# Altium PCB Filtros.PcbDoc
Units mil, origin at the board's own origin, x right, y up, seen from the top; angles counter-clockwise.
Board outline 6000 x 4000 mil, 2 copper layers (Top Layer, Bottom Layer); 155 components, 163 nets, 356 pads, 38 vias.
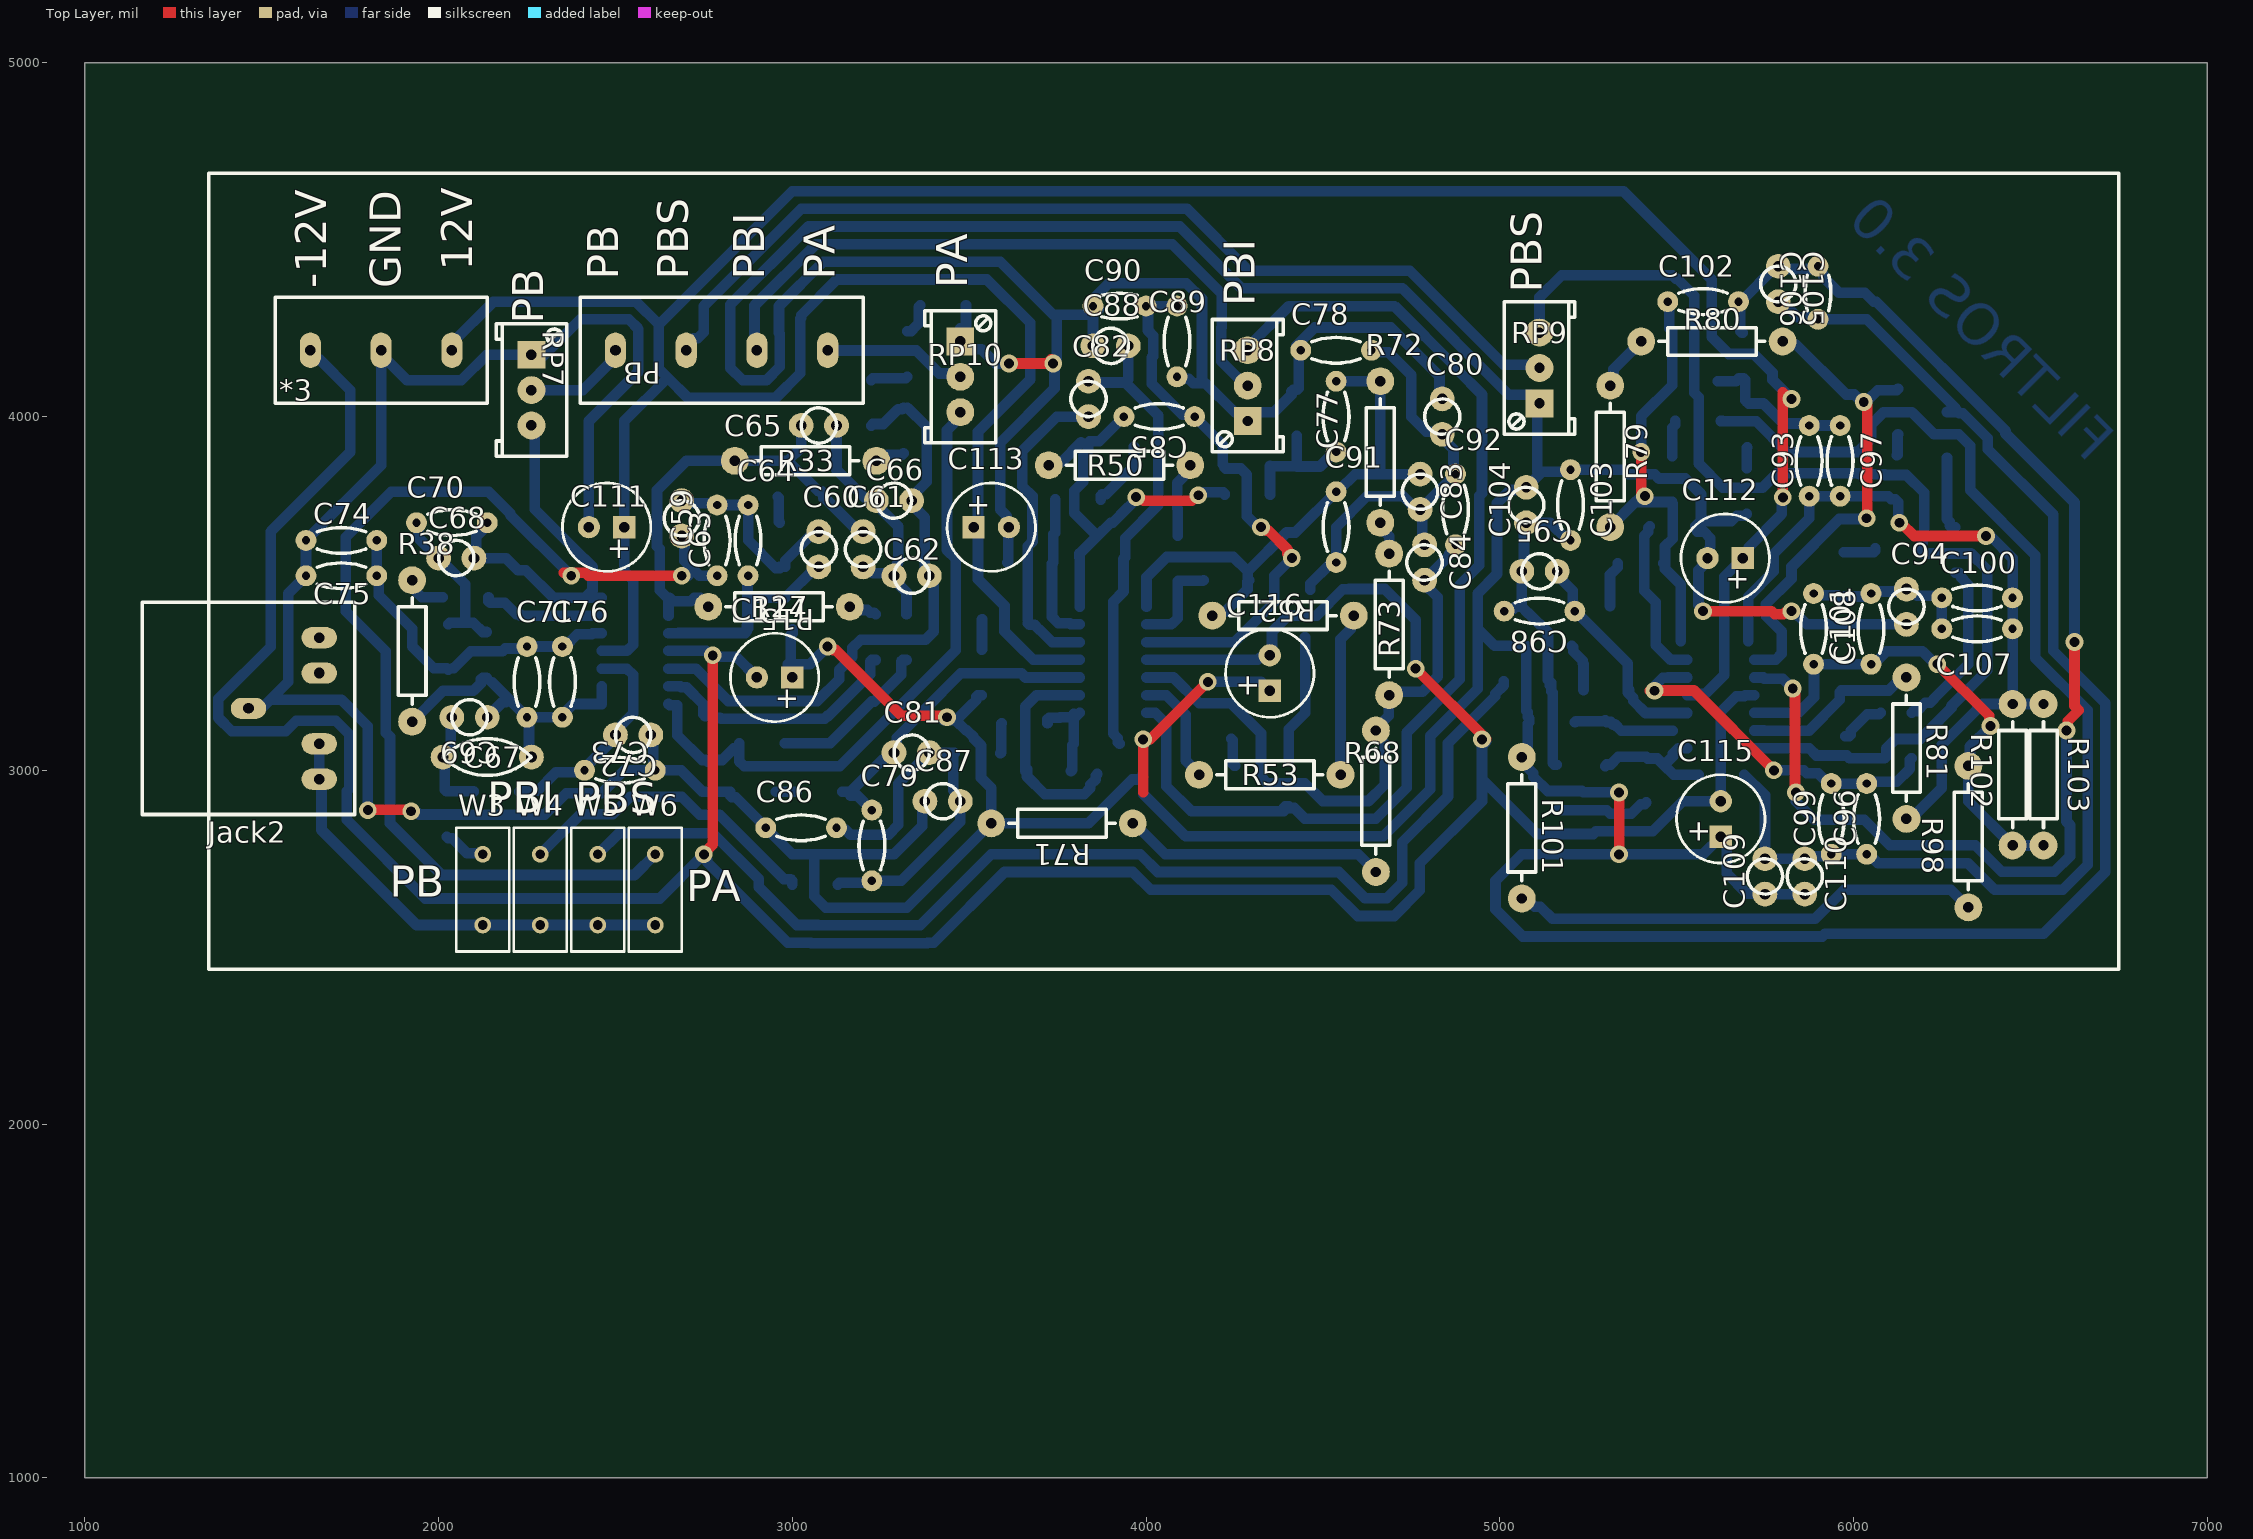
[diagram p0: Top Layer view]
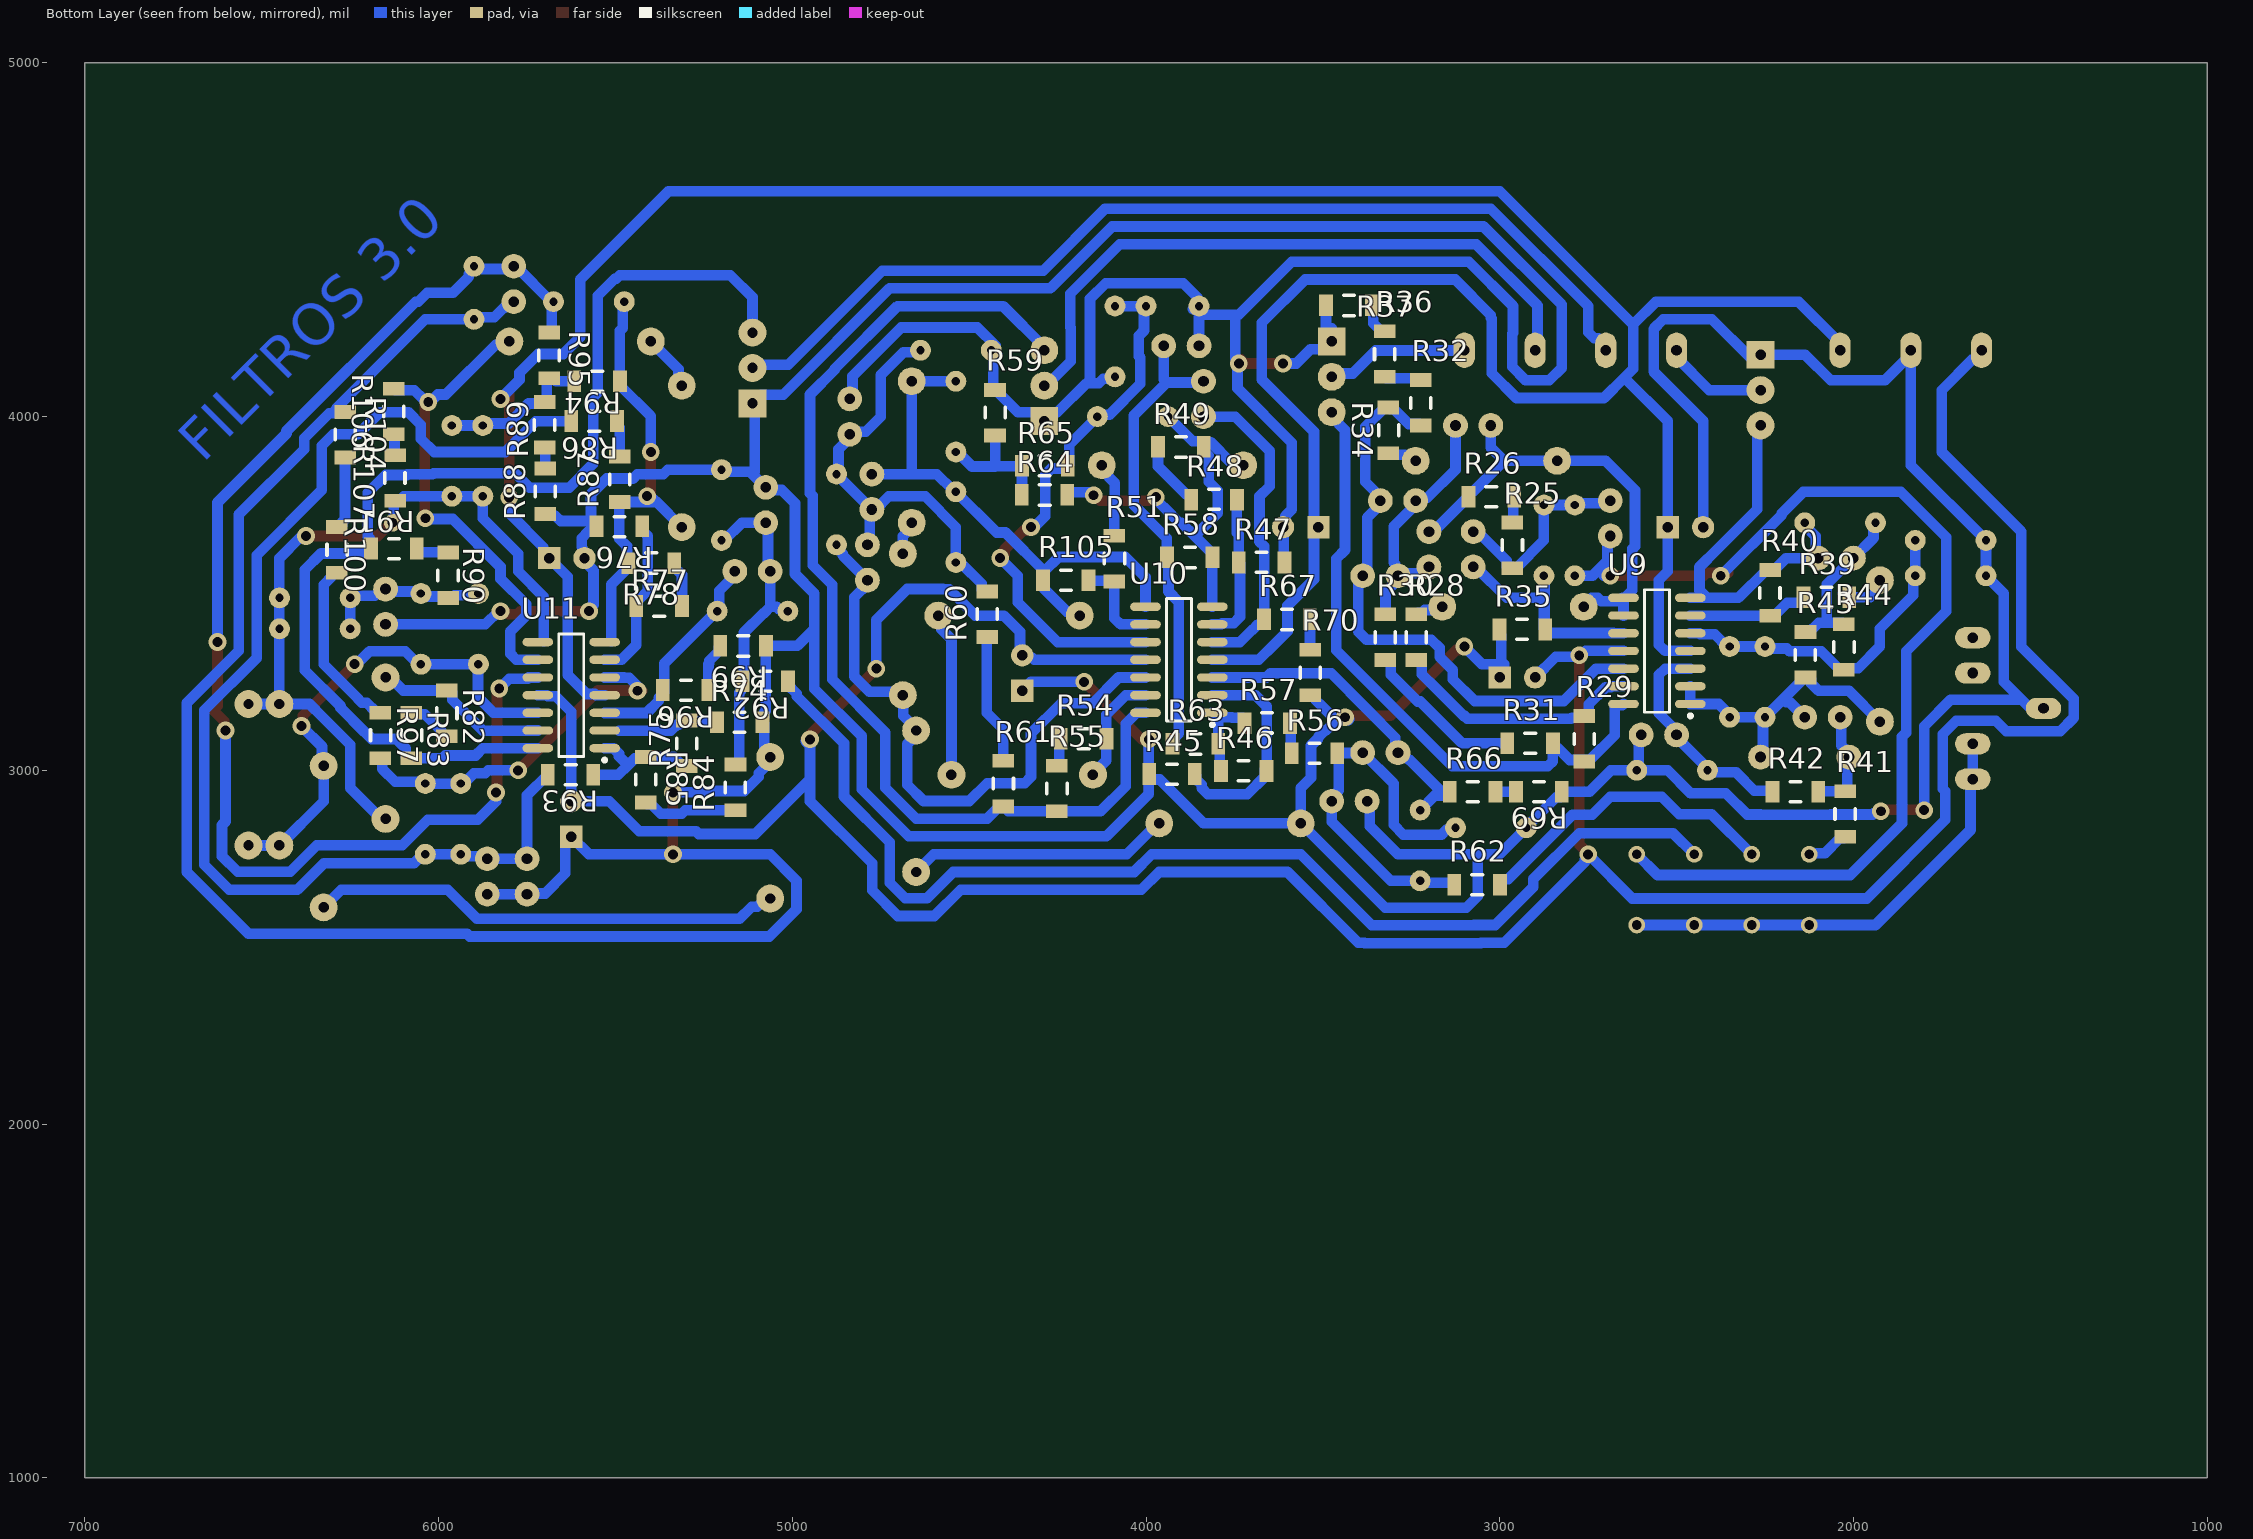
[diagram p1: Bottom Layer view, seen from below]
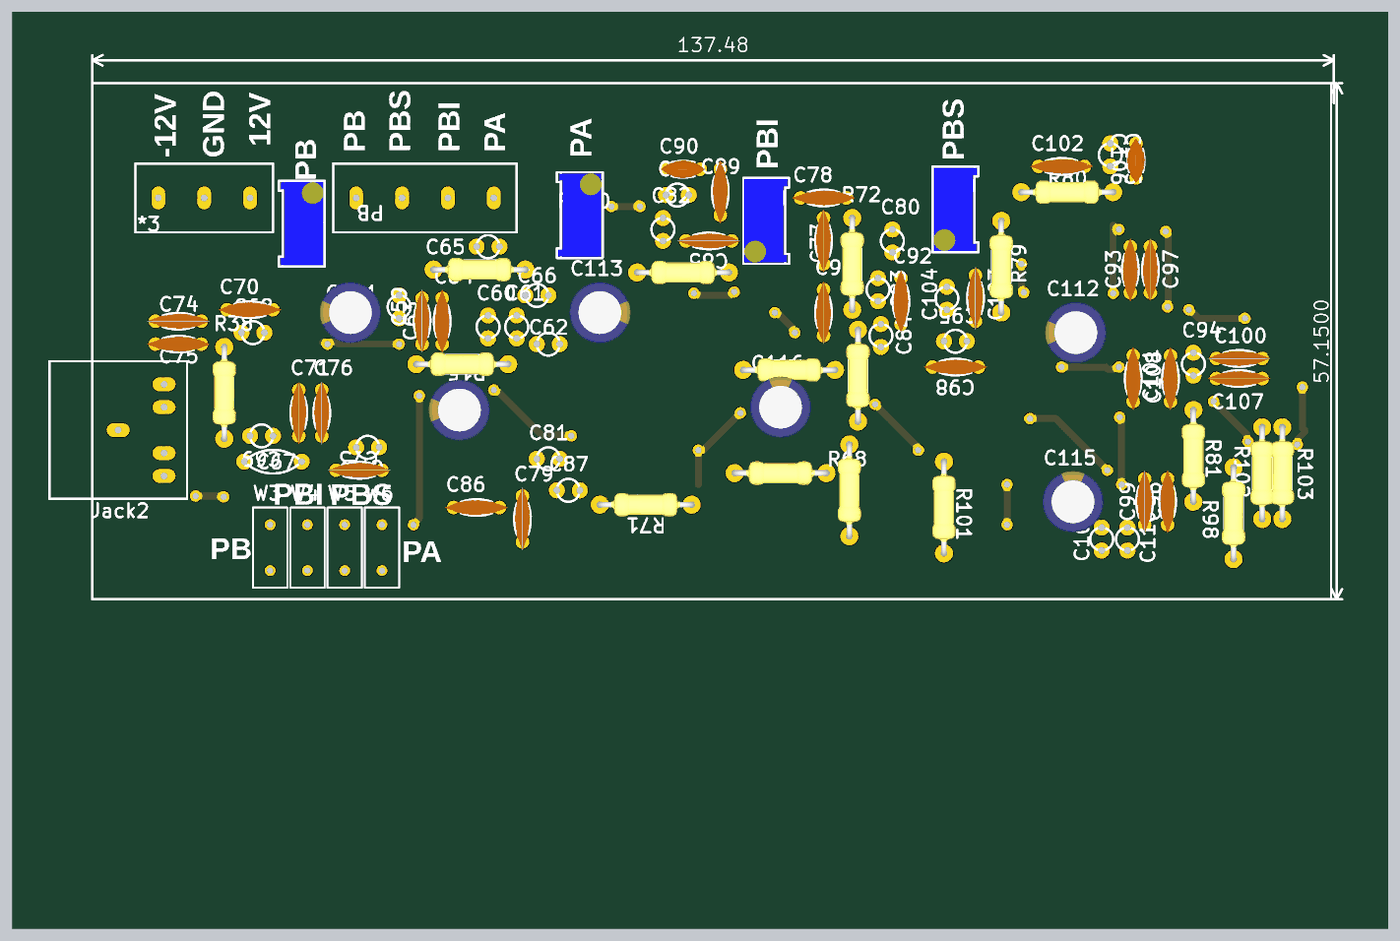
[diagram p2: 3D render of the assembled board from above, using the file's embedded part models]

## Layer stack, top to bottom
Top Solder: solder mask 0.4, Solder Resist, Dk 3.5
Top Layer: signal copper 1.4
Dielectric 1: dielectric 12.6, FR-4, Dk 4.8
Bottom Layer: signal copper 1.4
Bottom Solder: solder mask 0.4, Solder Resist, Dk 3.5

## Board outline
1000,1000 7000,1000 7000,5000 1000,5000

## Design rules (kind name [scope] priority, off if disabled: settings)
Clearance [All] p1: gap=20 ignorepadtopadclearanceinfootprint=TRUE except(0: Arc-Text Arc-Hole Track-Text Track-Hole SMDPad-Text SMDPad-Hole THPad-Text THPad-Hole Via-Text Via-Hole Fill-Text Fill-Hole Poly-Text Poly-Hole Region-Text Region-Hole Text-Text Text-Hole; 40: Arc-Fill Arc-Poly Arc-Region Track-Fill Track-Poly Track-Region)
ComponentClearance [All] p1: gap=0 collisioncheckmode=3 verticalgap=0 showdistances=FALSE
PolygonConnect [All] p1: connectstyle=Relief reliefconductorwidth=10 reliefentries=4 polygonreliefangle="90 Angle" airgapwidth=10
RoutingVias [All] p1: holewidth=28 width=50 viastyle="Through Hole" minholewidth=28 minwidth=50 maxholewidth=28 maxwidth=50
SolderMaskExpansion [All] p1: expansion=4 istentingtop=FALSE
Width [All] p1: maxlimit=60 minlimit=30 preferedwidth=40 minimp=50.000000 maximp=50.000000 favimp=50.000000
29 further rules are at their usual default settings.

## Classes and differential pairs
component class U_Filtros: *3 C111 C112 C113 C114 C115 C116 Jack2 P15 RP7 RP8 RP9 RP10 W3 W4 W5 W6
component class "Positive Pwr": *1
component class "Negative Pwr": *2
component class "Pasa Banda Superior": C93 C94 C95 C96 C97 C98 C99 C100 C101 C102 C103 C104 C105 C106 C107 C108 C109 C110 R74 R75 R76 R77 R78 R79 R80 R81 R82 R83 R84 R85 R86 R87 R88 R89 R90 R91 R92 R93 R94 R95 R96 R97 R98 R99 R100 R101 R102 R103 R104 R106 R107 U11
component class "Pasa Banda Inferior": C77 C78 C79 C80 C81 C82 C83 C84 C85 C86 C87 C88 C89 C90 C91 C92 R45 R46 R47 R48 R49 R50 R51 R52 R53 R54 R55 R56 R57 R58 R59 R60 R61 R62 R63 R64 R65 R66 R67 R68 R69 R70 R71 R72 R73 R105 U10
component class "Pasa Bajos": C67 C68 C69 C70 C71 C72 C73 C74 C75 C76 R38 R39 R40 R41 R42 R43 R44 U9
component class "Pasa Altos": C59 C60 C61 C62 C63 C64 C65 C66 R25 R26 R27 R28 R29 R30 R31 R32 R33 R34 R35 R36 R37

## Components (designator, comment, footprint, x,y, rotation, side; value= is the part's Value field where it differs from the comment)
*3 "Bornera 3" "bornera 3" 1637.5,4187.5 r0 top
C59 "Cap Ceramico Disco" "cap 10" 2687.5,3712.5 r270 top
C60 "Cap Ceramico Disco" "cap 10" 3075,3625 r90 top
C61 "Cap Ceramico Disco" "cap 10" 3200,3625 r90 top
C62 "Cap Ceramico Disco" "cap 10" 3337.5,3550 r180 top
C63 "Cap Ceramico Disco" "CAP DISCO 200mil" 2787.5,3650 r270 top
C64 "Cap Ceramico Disco" "CAP DISCO 200mil" 2875,3650 r90 top
C65 "Cap Ceramico Disco" "cap 10" 3075,3975 r180 top
C66 "Cap Ceramico Disco" "cap 10" 3287.5,3762.5 r180 top
C67 "Cap Ceramico Disco" "cap 25" 2162.5,3037.5 r180 top
C68 "Cap Ceramico Disco" "cap 10" 2050,3600 r0 top
C69 "Cap Ceramico Disco" "cap 10" 2087.5,3150 r180 top
C70 "Cap Ceramico Disco" "CAP DISCO 200mil" 2037.5,3700 r0 top
C71 "Cap Ceramico Disco" "CAP DISCO 200mil" 2250,3250 r270 top
C72 "Cap Ceramico Disco" "cap 10" 2550,3100 r180 top
C73 "Cap Ceramico Disco" "CAP DISCO 200mil" 2512.5,3000 r180 top
C74 "Cap Ceramico Disco" "CAP DISCO 200mil" 1725,3650 r180 top
C75 "Cap Ceramico Disco" "CAP DISCO 200mil" 1725,3550 r180 top
C76 "Cap Ceramico Disco" "CAP DISCO 200mil" 2350,3250 r270 top
C77 "Cap Ceramico Disco" "CAP DISCO 200mil" 4537.5,4000 r270 top
C78 "Cap Ceramico Disco" "CAP DISCO 200mil" 4537.5,4187.5 r180 top
C79 "Cap Ceramico Disco" "CAP DISCO 200mil" 3225,2787.5 r270 top
C80 "Cap Ceramico Disco" "cap 10" 4837.5,4000 r90 top
C81 "Cap Ceramico Disco" "cap 10" 3337.5,3050 r0 top
C82 "Cap Ceramico Disco" "cap 10" 3837.5,4050 r90 top
C83 "Cap Ceramico Disco" "cap 10" 4775,3787.5 r90 top
C84 "Cap Ceramico Disco" "cap 10" 4787.5,3587.5 r90 top
C85 "Cap Ceramico Disco" "CAP DISCO 200mil" 4037.5,4000 r180 top
C86 "Cap Ceramico Disco" "CAP DISCO 200mil" 3025,2837.5 r0 top
C87 "Cap Ceramico Disco" "cap 10" 3425,2912.5 r0 top
C88 "Cap Ceramico Disco" "cap 10" 3900,4200 r0 top
C89 "Cap Ceramico Disco" "CAP DISCO 200mil" 4087.5,4212.5 r270 top
C90 "Cap Ceramico Disco" "CAP DISCO 150mil" 3925,4312.5 r180 top
C91 "Cap Ceramico Disco" "CAP DISCO 200mil" 4537.5,3687.5 r90 top
C92 "Cap Ceramico Disco" "CAP DISCO 200mil" 4875,3737.5 r90 top
C93 "Cap Ceramico Disco" "CAP DISCO 200mil" 5875,3875 r90 top
C94 "Cap Ceramico Disco" "cap 10" 6150,3462.5 r270 top
C95 "Cap Ceramico Disco" "cap 10" 5112.5,3562.5 r180 top
C96 "Cap Ceramico Disco" "CAP DISCO 200mil" 6037.5,2862.5 r270 top
C97 "Cap Ceramico Disco" "CAP DISCO 200mil" 5962.5,3875 r90 top
C98 "Cap Ceramico Disco" "CAP DISCO 200mil" 5112.5,3450 r180 top
C99 "Cap Ceramico Disco" "CAP DISCO 200mil" 5937.5,2862.5 r270 top
C100 "Cap Ceramico Disco" "CAP DISCO 200mil" 6350,3487.5 r0 top
C101 "Cap Ceramico Disco" "CAP DISCO 200mil" 6050,3400 r90 top
C102 "Cap Ceramico Disco" "CAP DISCO 200mil" 5575,4325 r180 top
C103 "Cap Ceramico Disco" "CAP DISCO 200mil" 5200,3750 r270 top
C104 "Cap Ceramico Disco" "cap 10" 5075,3750 r270 top
C105 "Cap Ceramico Disco" "cap 10" 5787.5,4375 r270 top
C106 "Cap Ceramico Disco" "CAP DISCO 150mil" 5900,4350 r270 top
C107 "Cap Ceramico Disco" "CAP DISCO 200mil" 6350,3400 r0 top
C108 "Cap Ceramico Disco" "CAP DISCO 200mil" 5887.5,3400 r90 top
C109 "Cap Ceramico Disco" "cap 10" 5750,2700 r90 top
C110 "Cap Ceramico Disco" "cap 10" 5862.5,2700 r90 top
C111 "Cap Electrolitico Radial" "CAPR D250 H600 R100 mil" 2475,3687.5 r180 top
C112 "Cap Electrolitico Radial" "CAPR D250 H600 R100 mil" 5637.5,3600 r180 top
C113 "Cap Electrolitico Radial" "CAPR D250 H600 R100 mil" 3562.5,3687.5 r0 top
C114 "Cap Electrolitico Radial" "CAPR D250 H600 R100 mil" 2950,3262.5 r180 top
C115 "Cap Electrolitico Radial" "CAPR D250 H600 R100 mil" 5625,2862.5 r90 top
C116 "Cap Electrolitico Radial" "CAPR D250 H600 R100 mil" 4350,3275 r90 top
Jack2 "Jack 3.5mm" "jack 3.5mm" 1662.5,2975 r90 top
P15 "Header 4" "Bornera 4" 2500,4187.5 r0 top
R25 "Res SMD" "1206 resistor" 2962.5,3637.5 r270 bottom
R26 "Res SMD" "1206 resistor" 3025,3775 r180 bottom
R27 "Res SMD" "RES AXIAL 400mil" 2962.5,3462.5 r0 top
R28 "Res SMD" "1206 resistor" 3237.5,3375 r90 bottom
R29 "Res SMD" "1206 resistor" 2762.5,3087.5 r90 bottom
R30 "Res SMD" "1206 resistor" 3325,3375 r90 bottom
R31 "Res SMD" "1206 resistor" 2912.5,3075 r0 bottom
R32 "Res SMD" "1206 resistor" 3225,4037.5 r90 bottom
R33 "Res SMD" "RES AXIAL 400mil" 3037.5,3875 r0 top
R34 "Res SMD" "1206 resistor" 3312.5,3962.5 r270 bottom
R35 "Res SMD" "1206 resistor" 2937.5,3400 r180 bottom
R36 "Res SMD" "1206 resistor" 3327,4175.5 r90 bottom
R37 "Res SMD" "1206 resistor" 3425,4312.5 r0 bottom
R38 "Res SMD" "RES AXIAL 400mil" 1925,3337.5 r90 top
R39 "Res SMD" "1206 resistor" 2075,3487.5 r0 bottom
R40 "Res SMD" "1206 resistor" 2237.5,3500 r90 bottom
R41 "Res SMD" "1206 resistor" 2025,2875 r90 bottom
R42 "Res SMD" "1206 resistor" 2162.5,2937.5 r0 bottom
R43 "Res SMD" "1206 resistor" 2137.5,3325 r90 bottom
R44 "Res SMD" "1206 resistor" 2025,3350 r270 bottom
R45 "Res SMD" "1206 resistor" 3925,2987.5 r0 bottom
R46 "Res SMD" "1206 resistor" 3725,3000 r180 bottom
R47 "Res SMD" "1206 resistor" 3674.5,3589.5 r180 bottom
R48 "Res SMD" "1206 resistor" 3809,3767.5 r180 bottom
R49 "Res SMD" "1206 resistor" 3900,3912.5 r0 bottom
R50 "Res SMD" "RES AXIAL 400mil" 3925,3862.5 r0 top
R51 "Res SMD" "1206 resistor" 4087.5,3600 r270 bottom
R52 "Res SMD" "RES AXIAL 400mil" 4387.5,3437.5 r0 top
R53 "Res SMD" "RES AXIAL 400mil" 4350,2987.5 r180 top
R54 "Res SMD" "1206 resistor" 4175,3087.5 r0 bottom
R55 "Res SMD" "1206 resistor" 4250,2950 r270 bottom
R56 "Res SMD" "1206 resistor" 3525,3050 r180 bottom
R57 "Res SMD" "1206 resistor" 3658.5,3135.5 r180 bottom
R58 "Res SMD" "1206 resistor" 3875,3600 r0 bottom
R59 "Res SMD" "1206 resistor" 4425,4012.5 r270 bottom
R60 "Res SMD" "1206 resistor" 4447.16,3442.5 r270 bottom
R61 "Res SMD" "1206 resistor" 4401.62,2963.88 r270 bottom
R62 "Res SMD" "1206 resistor" 3062.5,2675 r0 bottom
R63 "Res SMD" "1206 resistor" 3859,3073 r0 bottom
R64 "Res SMD" "1206 resistor" 4285.37,3776.89 r0 bottom
R65 "Res SMD" "1206 resistor" 4287.5,3862.5 r180 bottom
R66 "Res SMD" "1206 resistor" 3075,2937.5 r0 bottom
R67 "Res SMD" "1206 resistor" 3600,3425 r0 bottom
R68 "Res SMD" "RES AXIAL 400mil" 4650,2912.5 r90 top
R69 "Res SMD" "1206 resistor" 2887.5,2937.5 r0 bottom
R70 "Res SMD" "1206 resistor" 3537.5,3275 r90 bottom
R71 "Res SMD" "RES AXIAL 400mil" 3762.5,2850 r0 top
R72 "Res SMD" "RES AXIAL 400mil" 4662.5,3900 r270 top
R73 "Res SMD" "RES AXIAL 400mil" 4687.5,3412.5 r270 top
R74 "Res SMD" "1206 resistor" 5150,3137.5 r180 bottom
R75 "Res SMD" "1206 resistor" 5300,3075 r90 bottom
R76 "Res SMD" "1206 resistor" 5487.5,3687.5 r0 bottom
R77 "Res SMD" "1206 resistor" 5375,3462.5 r0 bottom
R78 "Res SMD" "1206 resistor" 5400,3587.5 r180 bottom
R79 "Res SMD" "RES AXIAL 400mil" 5312.5,3887.5 r90 top
R80 "Res SMD" "RES AXIAL 400mil" 5600,4212.5 r0 top
R81 "Res SMD" "RES AXIAL 400mil" 6150,3062.5 r90 top
R82 "Res SMD" "1206 resistor" 5975,3162.5 r270 bottom
R83 "Res SMD" "1206 resistor" 6075,3100 r270 bottom
R84 "Res SMD" "1206 resistor" 5162.5,2950 r90 bottom
R85 "Res SMD" "1206 resistor" 5412.5,2975 r270 bottom
R86 "Res SMD" "1206 resistor" 5559,3985.5 r0 bottom
R87 "Res SMD" "1206 resistor" 5489.5,3821.5 r90 bottom
R88 "Res SMD" "1206 resistor" 5700,3787.5 r90 bottom
R89 "Res SMD" "1206 resistor" 5702,3975.5 r90 bottom
R90 "Res SMD" "1206 resistor" 5975,3550 r90 bottom
R91 "Res SMD" "1206 resistor" 6125,3625 r0 bottom
R92 "Res SMD" "1206 resistor" 5075,3250 r0 bottom
R93 "Res SMD" "1206 resistor" 5625.5,2985.5 r0 bottom
R94 "Res SMD" "1206 resistor" 5550.5,4098 r0 bottom
R95 "Res SMD" "1206 resistor" 5689.5,4171.5 r90 bottom
R96 "Res SMD" "1206 resistor" 5300,3225 r0 bottom
R97 "Res SMD" "1206 resistor" 6162.5,3100 r270 bottom
R98 "Res SMD" "RES AXIAL 400mil" 6325,2812.5 r90 top
R99 "Res SMD" "1206 resistor" 5137.5,3350 r0 bottom
R100 "Res SMD" "1206 resistor" 6285.5,3624.5 r270 bottom
R101 "Res SMD" "RES AXIAL 400mil" 5062.5,2837.5 r270 top
R102 "Res SMD" "RES AXIAL 400mil" 6450,2987.5 r270 top
R103 "Res SMD" "RES AXIAL 400mil" 6537.5,2987.5 r270 top
R104 "Res SMD" "1206 resistor" 6262.5,3950 r270 bottom
R105 "Res SMD" "1206 resistor" 4225.5,3535.5 r0 bottom
R106 "Res SMD" "1206 resistor" 6128.25,4013 r90 bottom
R107 "Res SMD" "1206 resistor" 6125,3825 r90 bottom
RP7 "Trimpot" "Trimpot Multivuelta Vertical" 2262.5,4075 r90 top
RP8 "Trimpot" "Trimpot Multivuelta Vertical" 4287.5,4087.5 r270 top
RP9 "Trimpot" "Trimpot Multivuelta Vertical" 5112.5,4137.5 r270 top
RP10 "Trimpot" "Trimpot Multivuelta Vertical" 3475,4112.5 r90 top
U9 "TL084ACD" 751A-02_N 2555.51,3337.5 r0 bottom
U10 "TL084ACD" 751A-02_N 3906.99,3312.5 r0 bottom
U11 "TL084ACD" 751A-02_N 5625,3212.5 r0 bottom
W3 "Jumper" RAD-0.2 2125,2662.5 r90 top
W4 "Jumper" RAD-0.2 2287.5,2662.5 r90 top
W5 "Jumper" RAD-0.2 2450,2662.5 r90 top
W6 "Jumper" RAD-0.2 2612.5,2662.5 r90 top

## Footprints (in the part's own frame and the unit in brackets; to place one, negate y for a bottom-side part, rotate by r counter-clockwise, add the part's x,y. Pads: shape width x height; smd on the part's side, far side on the other; paste and mask are expansions set on the pad)
751A-02_N [mm] "SOIC, 14-Leads, Body 8.7x3.9mm, Pitch 1.27mm, IPC Medium Density"
  oval 2.2x0.6 smd: 1(-2.4,3.81) 2(-2.4,2.54) 3(-2.4,1.27) 4(-2.4,0) 5(-2.4,-1.27) 6(-2.4,-2.54) 7(-2.4,-3.81) 8(2.4,-3.81) 9(2.4,-2.54) 10(2.4,-1.27) 11(2.4,0) 12(2.4,1.27) 13(2.4,2.54) 14(2.4,3.81)
  silkscreen extent -2.52,-4.4 0.9,4.78, body extent -1.95,-4.33 1.95,4.33, height 1.75
"1206 resistor" [mil]
  rect 39x61 smd: 1(-63,-2) 2(66,-2)
  silkscreen extent -14,-30 16,27
"bornera 3" [mil]
  oval 60x100 hole 30: 1(0,0) 2(200,0) 3(400,0)
  silkscreen extent -100,-150 500,150
"Bornera 4" [mil]
  oval 60x100 hole 30: 1(0,0) 2(200,0) 3(400,0) 4(600,0)
  silkscreen extent -100,-150 700,150
"cap 10" [mil]
  round 70 hole 30: 1(-50,0) 2(50,0)
  silkscreen extent -50,-50 50,50
"cap 25" [mil]
  round 70 hole 30: 1(-100,0) 2(150,0)
  silkscreen extent -100,-52 150,52
"CAP DISCO 150mil" [mm] "Capacitor; 2 Leads"
  round 1.5 hole 0.6: 1(-1.905,0) 2(1.905,0)
  silkscreen extent -1.27,-0.92 1.27,0.92, body extent -2.46,-1 2.46,1, height 6.96
"CAP DISCO 200mil" [mm] "Capacitor; 2 Leads"
  round 1.5 hole 0.6: 1(-2.54,0) 2(2.54,0)
  silkscreen extent -1.74,-0.93 1.74,0.93, body extent -3.5,-0.85 3.49,0.85, height 7.5
"CAPR D250 H600 R100 mil" [mm]
  rect 1.6x1.6 hole 0.75: 1(-1.27,0)
  round 1.6 hole 0.75: 2(1.27,0)
  silkscreen extent -3.17,-3.17 3.17,3.17, body extent -3.4,-3.39 3.37,3.39, height 2.49
"jack 3.5mm" [mil]
  oval 60x100 hole 30: 1(0,0) 1(100,0) 2(300,0) 2(400,0) 3(200,200)
  Top Layer region: 400,400
  silkscreen extent -100,-100 500,500
RAD-0.2 [mm] "Radial Cap, Thru-Hole; 2 Leads; 0.2 in Pin Spacing"
  round 1.2 hole 0.7: 1(-2.54,0) 2(2.54,0)
  silkscreen extent -4.44,-1.91 4.44,1.91
"RES AXIAL 400mil" [mm]
  round 2 hole 0.75: 1(-5.08,0) 2(5.08,0)
  silkscreen extent -3.81,-1 3.81,1, body extent -5.41,-1.3 5.41,1.3, height 2.7
"Trimpot Multivuelta Vertical" [mm] "Preset Multivuelta de ajuste vertical"
  rect 2x2 hole 0.75: 1(2.54,0)
  round 2 hole 0.75: 2(-2.54,0) 3(0,0)
  silkscreen extent -4.75,-2.54 4.75,2.54, body extent -4.6,-2.41 4.6,2.39, height 12.06

## Part data
C59 C60 C61 C62 C63 C64 C65 C66 C67 C68 C69 C70 C71 C72 C73 C74 C75 C76 C77 C78 C79 C80 C81 C82 C83 C84 C85 C86 C87 C88 C89 C90 C91 C92 C93 C94 C95 C96 C97 C98 C99 C100 C101 C102 C103 C104 C105 C106 C107 C108 C109 C110: "Capacitor Ceramico de Insercion", FABRICANTE=Generico
  C59 C60 C61 C62 C110: VALOR=2.2nF
  C63 C64 C96: VALOR=560pF
  C65 C66 C76 C80 C105: VALOR=470pF
  C67: VALOR=56nF
  C68 C82 C88: VALOR=33nF
  C69: VALOR=4.7nF
  C70 C77: VALOR=100nF
  C71 C98 C103 C107 C108: VALOR=5.6nF
  C72 C81 C87: VALOR=47nF
  C73 C78 C89 C99: VALOR=3.3nF
  C74 C75 C95 C97 C104: VALOR=10nF
  C79 C86: VALOR=27nF
  C83 C84: VALOR=22nF
  C85 C93 C100 C101: VALOR=1nF
  C90 C94 C106: VALOR=330pF
  C91 C92: VALOR=6.8nF
  C102: VALOR=220pF
  C109: VALOR=1.5nF
C111 C112 C113 C114 C115 C116: "Cap Electrolitico de insercion", VALOR=10uF/16V
P15: "Header, 4-Pin", LatestRevisionDate=17-Jul-2002, LatestRevisionNote="Re-released for DXP Platform.", Publisher="Altium Limited"
R25 R26 R27 R28 R29 R30 R31 R32 R33 R34 R35 R36 R37 R38 R39 R40 R41 R42 R43 R44 R45 R46 R47 R48 R49 R50 R51 R52 R53 R54 R55 R56 R57 R58 R59 R60 R61 R62 R63 R64 R65 R66 R67 R68 R69 R70 R71 R72 R73 R74 R75 R76 R77 R78 R79 R80 R81 R82 R83 R84 R85 R86 R87 R88 R89 R90 R91 R92 R93 R94 R95 R96 R97 R98 R99 R100 R101 R102 R103 R104 R105 R106 R107: "Res Smd"
  R25 R34 R56: VALOR=5K6
  R26 R30 R37 R61 R66: VALOR=2K7
  R27 R38 R52 R80: VALOR=100K
  R28 R39 R71 R101: VALOR=47K
  R29 R35 R36 R40 R41 R42 R43 R44 R45 R46 R47 R48 R62 R63 R64 R65 R74 R75 R76 R82 R84 R86 R87 R92 R93 R94 R95 R96 R107: VALOR=10K
  R31 R60: VALOR=1K
  R32 R77 R105: VALOR=15K
  R33: VALOR=82K
  R49 R78 R106: VALOR=2.7K
  R50: VALOR=560K
  R51 R59 R88 R89: VALOR=22K
  R53 R81: VALOR=220k
  R54 R58 R67 R100: VALOR=8K2
  R55: VALOR=3K2
  R57 R83 R99: VALOR=560R
  R68 R98: VALOR=47k
  R69 R90 R97: VALOR=4K7
  R70: VALOR=560
  R72: VALOR=100k
  R73: VALOR=120k
  R79: VALOR=220K
  R85 R91: VALOR=1K5
  R102: VALOR=470k
  R103: VALOR=560k
  R104: VALOR=330R
RP7 RP8 RP9 RP10: "Preset", VALOR=10K
U9 U10 U11: "JFET-Input Operational Amplifier", Code_IPC=SOIC127P600-14, ComponentLink1Description="Manufacturer Link", ComponentLink1URL=http://www.onsemi.com/site/products/parametrics/0,4446,251,00.html, DatasheetVersion=1988, LatestRevisionDate=13-Apr-2006, LatestRevisionNote="IPC-7351 Footprint Added.", PackageDescription="14-Pin Small Outline Integrated Circuit 1.27 mm Pitch", PackageReference=751A-02, PackageVersion=1991, Published=17-Jul-2002, Publisher="Altium Limited"
W3 W4 W5 W6: "Jumper Wire", LatestRevisionDate=17-Jul-2002, LatestRevisionNote="Re-released for DXP Platform.", PackageDescription="Radial Cap, Thru-Hole; 2 Leads; 0.2 in Pin Spacing", PackageReference=RAD-0.2, Published=24-Mar-1999, Publisher="Altium Limited"

## Via types
v1: diameter 50, hole 28, Top Layer to Bottom Layer, 38 vias

## Nets (pads, with @x,y where several pads share a name; then routed paths per layer and width w, separated by ;. In a path a pad name is that pad's centre, name@x,y a point inside that pad or via, vN(x,y) a via of type N, cw(c..) or ccw(c..) an arc to the next point about the centre after c; other vN are vias at no path point)
12V: *3.3 C111.1 C112.1 C113.1 U9.4 U10.4 U11.4 | length 9045.2
  Top Layer w30: v1(5800.47,3771.62) 5800.47,4069.12 5819.59,4050 v1(5825,4050)
  Bottom Layer w30: *3.3 2037.5,4207.5 2155,4325 2558.21,4325 2622.5,4260.71 2622.5,4260 ; U9.4 2532.43,3337.5 2550,3355.07 2550,3537.5 2525,3562.5 C111.1 2525,3987.5 2647.64,4110.14 ; U10.4 3681,3312.5 3636.25,3357.25 3600,3393.5 3600,3465.15 3525,3540.15 3525,3675 C113.1 3525,3700 3525,3957.32 3672.5,4104.82 3672.5,4265 3550,4387.5 3125.58,4387.5 3025,4286.92 3025,4279.29 3022.5,4276.79 3022.5,4122.5 2952.5,4052.5 2705.29,4052.5 2647.64,4110.14 ; U11.4 5555.63,3212.5 5558.82,3215.69 5581.4,3215.69 5635,3269.29 5635,3547.5 5704,3616.5 5704,3631 5797.8,3724.8 5797.8,3768.95 v1(5800.47,3771.62) ; v1(5825,4050) 5771.17,4103.83 5771.17,4124.32 5718.37,4177.13 5647.87,4177.13 5600,4225 5600,4387.5 5350,4637.5 3000,4637.5 2622.5,4260 ; 2622.5,4260 2622.5,4135.29 2647.64,4110.14
32V: 
-12V: *3.1 C114.2 C115.2 C116.2 U9.11 U10.11 U11.11 | length 9189.6
  Top Layer w30: v1(2750,2762.5) v1@2750,2765.07 ; v1@2752.57,2762.5 2751.29,2763.79 v1@2750,2765.07 ; v1(2775,3325) 2775,2790.07 v1@2750,2765.07 ; v1(4762.5,3287.5) 4962.5,3087.5 v1(4950,3087.5)
  Bottom Layer w30: *3.1 1637.5,4175.62 1651.36,4161.76 1663.24,4161.76 1750,4075 1750,3900 1525,3675 1525,3349.42 1377.5,3201.92 1377.5,3148.08 1415.58,3110 1567.51,3110 1597.51,3140 1709.42,3140 1747.5,3101.92 1747.5,2948.08 1740,2940.58 1740,2860 1962.5,2637.5 2625,2637.5 v1@2747.29,2759.79 ; U9.11 v1@2757.09,3337.5 ; v1(2750,2762.5) v1@2747.29,2759.79 ; v1@2784.24,3321.17 2841.33,3321.17 C114.2 ; U10.11 4315.93,3312.5 4322.12,3318.69 4343.69,3318.69 C116.2 4356.31,3331.31 4356.31,3391.81 4402,3437.5 4482.32,3437.5 4556.69,3511.87 4574.37,3511.87 4575,3512.5 4675,3512.5 4762.5,3425 v1(4762.5,3287.5) ; v1(4950,3087.5) 4957.09,3087.5 4962.5,3082.09 4950,3069.59 4950,2975 ; U11.11 5694.37,3212.5 5691.18,3209.31 5668.6,3209.31 5625,3165.71 C115.2 5517.5,2912.5 5432.5,2827.5 5272.17,2827.5 5264.67,2820 5105,2820 4950,2975 ; v1@2747.29,2759.79 2760,2747.09 2760,2740 2987.5,2512.5 3052.08,2512.5 3053.08,2511.5 3382.21,2511.5 3383.21,2512.5 3400,2512.5 3600,2712.5 3963.02,2712.5 4013.02,2662.5 4524.11,2662.5 4598.48,2588.13 4701.51,2588.13 4774.37,2660.98 4774.37,2736.87 4950,2912.5 4950,2975
-20V: 
-32V: 
GND: *3.2 C72.1 C73.1 C74.2 C75.2 C78.2 C80.2 C86.1 C87.1 C88.1 C89.2 C90.2 C94.2 C103.1 C104.1 C105.2 C106.2 C109.1 C110.1 C111.2 C112.2 C113.2 C114.1 C115.1 C116.1 Jack2.3 R35.1 R37.2 R45.2 R47.2 R59.1 R69.1 R70.1 R71.1 R74.2 R76.2 R88.1 R99.1 R101.1 R104.1 RP7.1 RP8.1 RP9.1 RP10.1 | length 25275.2
  Top Layer w30: v1(1800,2887.5) 1800.71,2888.21 1913.04,2888.21 1913.26,2887.99 1918.9,2887.99 v1@1919.12,2888.21 ; v1(3100,3350) 3105.41,3350 3115.41,3340 3122.5,3340 3308.67,3153.83 3433.67,3153.83 v1(3437.5,3150) ; v1(3612.5,4150) 3719.59,4150 3732.09,4162.5 3737.5,4157.09 v1(3737.5,4150) ; 3992,2938.41 v1(3992,3087.5) 4012.5,3087.5 v1(4175,3250) ; v1(5337.5,2762.5) v1(5337.5,2937.5) ; v1(5575,3450) 5768.42,3450 5777.21,3441.21 5802.06,3441.21 5807.03,3446.17 5821.17,3446.17 v1(5825,3450)
  Bottom Layer w30: Jack2.3 1468.24,3180.74 1505.74,3180.74 1526.86,3201.86 1575,3250 1575,3500 C75.2 1630.56,3555.56 1625,3561.12 C74.2 1837.5,3862.5 *3.2 ; 1528.71,3200 1725,3200 1800,3125 v1(1800,2887.5) ; *3.2@1837.5,4175.62 1910.62,4102.5 2064.42,4102.5 2136.92,4175 RP7.1 2281.25,4156.25 2290.62,4165.62 2400,4275 2537.5,4275 2565,4247.5 2565,4127.5 2425,3987.5 C111.2 ; v1(1922.5,2884.17) 1926.33,2880.34 1940.47,2880.34 1945.81,2875 2064.5,2875 2065.5,2874 2262.5,2874 2263.5,2875 2300,2875 2360.47,2935.47 2460.47,2935.47 2525,3000 C73.1 ; C72.1 2606.94,3093.06 2606.94,3005.56 C73.1 ; R69.1@2824.5,2928.5 2829,2924 2840,2924 2925,2839 C86.1 3000,2762.5 3057.43,2762.5 3062.5,2757.43 3062.5,2643.5 3094.5,2611.5 3324,2611.5 R71.1 ; R69.1 2746,2939.5 2685.5,3000 C73.1 ; C114.1 2987.5,3275 2987.5,3300 2996,3300 ; R35.1 3000.5,3387 2996,3382.5 2996,3300 ; 3062.5,2762.5 3287.5,2762.5 3367.35,2842.35 3367.35,2904.85 C87.1 ; v1(3100,3350) 3050,3300 2996,3300 ; v1(3437.5,3150) 3430.5,3150 3425,3144.5 3428.5,3141 3462.5,3141 ; RP10.1 3475,4250 RP10.1@3491,4234 ; R37.2 RP10.1@3491,4234 ; R70.1 3524.5,3212 3520,3207.5 3520,3198.5 3504,3182.5 3462.5,3141 ; R47.2 3610.5,3589.5 3610.5,3685.5 C113.2 3606.19,3693.81 3606.19,3718.81 3587.5,3737.5 3587.5,3925.89 3741.33,4079.72 3741.33,4153.83 v1(3737.5,4150) 3737.5,4155.41 3747.5,4165.41 3747.5,4285 3750,4287.5 ; v1(3612.5,4150) 3575,4150 3534.94,4190.06 3499.37,4190.06 3493.75,4195.68 3493.75,4231.25 RP10.1@3491,4234 ; C88.1 3850,4279.64 ; C90.2@3862.5,4312.5 C90.2 3855.56,4318.06 3855.56,4337.51 3895.07,4377.03 4114.23,4377.03 4158.19,4333.07 4158.19,4094.44 ; C90.2@3867.2,4304.25 3837.83,4287.5 3750,4287.5 ; R45.2 3991,2978.5 3986.5,2974 3961.5,2974 3837.5,2850 R71.1 ; R45.2@3992,2974 3992,2933 4111.87,2813.13 4670.37,2813.13 4803.94,2946.69 4803.94,3097 4937.5,3230.56 4937.5,3400 ; R45.2@3992,2989.5 v1(3992,3087.5) ; C89.2 4093.06,4106.94 4120.83,4106.94 4133.33,4094.44 4158.19,4094.44 ; v1(4175,3250) 4325,3250 C116.1 ; C78.2@4425,4187.5 4425,4200 4477.03,4252.03 4692.13,4252.03 4829.85,4114.31 4829.85,4057.65 C80.2 ; R59.1 4416,4075.5 4411.5,4071 4411.5,4061.5 4361.87,4011.87 4311.87,4011.87 RP8.1 4263.13,4011.87 4250.63,4011.87 4168.06,4094.44 4158.19,4094.44 ; R59.1@4432.25,4080 4432.25,4182.25 C78.2 ; R99.1 4985.5,3352 4937.5,3400 ; R99.1@5075,3340.5 5075,3325 5075.25,3324.75 5075.25,3168.57 5079.5,3164.32 5079.5,3151 5084,3146.5 R74.2@5084,3135.75 ; R74.2 R74.2@5084,3135.75 ; 5106.25,3843.75 5106.25,4031.25 RP9.1 5088.13,4061.87 5025.63,4061.87 4725,4362.5 4270.18,4362.5 4095.18,4537.5 3045.71,4537.5 2825,4316.79 2825,4137.5 2860,4102.5 2926.92,4102.5 2965,4140.58 2965,4234.42 2962.5,4236.92 2962.5,4312.5 3087.5,4437.5 3587.5,4437.5 3737.5,4287.5 3750,4287.5 ; v1(5337.5,2937.5) 5235.8,2937.5 5231.8,2941.5 5135.5,2941.5 5095,2982 5095,2991.81 5062.5,3024.31 R101.1 5062.5,3050.69 5079.5,3067.69 5079.5,3131.25 R74.2@5084,3135.75 ; R76.2 R76.2@5569,3705 ; R76.2@5558,3679.5 5558,3674 5578.17,3674 5595.74,3656.43 5595.74,3631.57 5593.81,3629.64 5593.81,3606.31 C112.2 5587.5,3591.07 5562.22,3565.8 5562.22,3468.19 5575,3455.41 v1(5575,3450) ; R88.1 5693.5,3720 5670,3720 5655,3705 R76.2@5569,3705 ; C105.2 5798.32,4325 5842.76,4280.56 5894.44,4280.56 C106.2 6037.5,4275 R104.1@6287.5,4025 ; v1(5825,3450) 5830.41,3450 5867.91,3412.5 C94.2 ; C110.1 C109.1 5748.43,2651.57 5698.43,2651.57 5641.5,2708.5 5641.5,2796 C115.1 5575,2762.5 v1(5337.5,2762.5) 5062.5,2762.5 4988.13,2688.13 4988.13,2606.69 5064.83,2530 5912.21,2530 5919.71,2537.5 6537.5,2537.5 6712.5,2712.5 6712.5,3190.15 6565,3337.65 6565,3723.18 6380,3908.18 6380,3938.71 6308.96,4009.75 6299.6,4009.75 6296.35,4013 R104.1 ; 3462.5,3141 3490,3113.5 3493,3113.5 3513.5,3093 3513.5,3090 3533.5,3070 3533.5,2979 3562.5,2950 R71.1 ; 4937.5,3400 4937.5,3500 4992.5,3555 4992.5,3755 5029.85,3792.35 5067.35,3792.35 C104.1 5119.44,3844.44 5194.44,3844.44 C103.1 5352.57,3850 5365.07,3837.5 5438,3837.5 5450.5,3825 5525,3825 5569,3781 R76.2@5569,3705
Net1_2: 
Net1_3: 
Net1_4: 
Net1_6: 
Net1_7: 
Net1_10: 
Net1_11: 
Net1_12: 
Net*1_1: 
Net*1_2: 
Net*1_3: 
Net*1_4: 
Net*1_5: 
Net*1_6: 
Net*2_2: 
Net*2_4: 
Net*2_5: 
Net*2_6: 
NetB1_1: 
NetB1_3: 
NetC21_1: 
NetC22_1: 
NetC22_2: 
NetC23_1: 
NetC23_2: 
NetC24_1: 
NetC24_2: 
NetC29_2: 
NetC30_1: 
NetC30_2: 
NetC33_1: 
NetC33_2: 
NetC34_2: 
NetC35_2: 
NetC38_2: 
NetC44_1: 
NetC45_1: 
NetC48_1: 
NetC49_2: 
NetC51_1: 
NetC55_1: 
NetC56_2: 
NetC58_2: 
NetC59_1: C59.1 C60.2 C63.1 C64.2 R25.2 | length 575.9
  Bottom Layer w30: C59.1 2694.44,3755.56 2781.94,3755.56 C63.1 C64.2 2875,3650 2953.5,3571.5 R25.2 ; R25.2@2964.5,3576 2980,3576 2980,3592.5 3054.85,3667.35 3067.35,3667.35 C60.2
NetC59_2: C59.2 C63.2 W6.2 | length 3025.5
  Top Layer w30: v1@2353.83,3558.67 2414.84,3558.67 2423.51,3550 v1(2687.5,3550)
  Bottom Layer w30: v1(2375,3550) 2202.03,3722.97 2202.03,3726.73 2141.26,3787.5 1865.68,3787.5 1737.5,3659.32 1737.5,3450 1850.63,3336.87 1850.63,3106.69 1862.5,3094.82 1862.5,2850 2008.62,2703.88 2553.88,2703.88 W6.2 ; v1(2687.5,3550) v1@2705.41,3550 ; C59.2 2695.15,3654.85 2695.15,3592.35 2737.5,3550 C63.2
NetC60_1: C60.1 C64.1 R35.2 U9.10 | length 714.7
  Bottom Layer w30: U9.10 2677.67,3387.5 2678.31,3388.13 2867,3388.13 2871.5,3392.63 R35.2@2871.5,3409 ; R35.2 2875,3401.5 2875,3487.5 2980,3487.5 3067.5,3575 C60.1 ; R35.2@2873.25,3403.25 2873.25,3484 2873.25,3548.25 C64.1
NetC61_1: C61.1 C62.2 C65.1 C66.2 R30.2 | length 736.1
  Bottom Layer w30: C65.1 3125,3850 3204.85,3770.15 3229.85,3770.15 C66.2 3237.5,3751.68 3300,3689.18 3300,3587.57 3295.15,3582.73 3295.15,3557.65 C62.2 3293.22,3544.28 3293.22,3533.45 3323,3503.68 R30.2 ; C61.1 3210.82,3575 3228.17,3557.65 3269.02,3557.65 C62.2@3282.4,3544.28
NetC61_2: C61.2 C65.2 R26.1 R27.1 R33.1 U9.8 U9.9 | length 1320.6
  Bottom Layer w30: U9.9 2650,3484.31 2652.92,3487.23 2662.65,3477.5 2712.35,3477.5 2722.35,3487.5 2740.15,3487.5 2762.5,3465.15 R27.1 ; U9.8 2646.81,3487.5 2625,3509.31 2625,3626.01 2617.5,3633.51 2617.5,3791.49 2701.01,3875 R33.1 2909.33,3875 2987.5,3875 ; C65.2 3025,3912.5 2987.5,3875 ; R26.1@3088,3770 3092.5,3770 3174.64,3687.86 3176.32,3687.86 3189.18,3675 C61.2 ; R26.1 3088,3784 3083.5,3788.5 3074,3788.5 2987.5,3875
NetC62_1: C62.1 C66.1 R32.1 R34.1 U9.12 | length 1700
  Bottom Layer w30: U9.12 2727.65,3287.5 2819.14,3196 3071,3196 3132.5,3257.5 3132.5,3283.5 3170,3321 3170,3346 3193.29,3369.29 3376.71,3369.29 3400,3392.57 3400,3526.68 3387.5,3539.18 3387.5,3560 3375,3572.5 3375,3714.18 3337.5,3751.68 C66.1 ; R32.1 3227.5,3979 3257,3979 3299,4021 3310,4021 R34.1 ; R34.1@3325.5,4025.5 3380,3971 3380,3815.82 C66.1@3337.5,3773.32
NetC67_1: C67.1 C69.1 C71.2 C76.2 R38.1 R43.1 U9.1 U9.2 | length 888.8
  Bottom Layer w30: R38.1 2012.5,3225 2098.5,3225 2120,3246.5 2120,3257.5 2124.5,3262 R43.1 ; C69.1 2180.45,3192.95 2189.49,3192.95 2198.27,3201.73 ; R43.1@2151,3249 2198.27,3201.73 ; C67.1 2255.56,3044.44 2255.56,3144.44 C71.2 ; U9.2 U9.1 2381,3187.5 2350,3156.5 C76.2 2325,3150 2262.5,3150 C71.2 ; 2198.27,3201.73 C71.2
NetC67_2: C67.2 C69.2 R41.2 R42.1 | length 301.3
  Bottom Layer w30: C69.2 2034.18,3146.68 2034.18,3070 2012.5,3048.32 C67.2 2017.75,3032.25 2017.75,2945.5 2022.25,2941 R41.2 2023.75,2940.25 2098.75,2940.25 R42.1
NetC68_1: C68.1 C70.1 R43.2 R44.1 | length 481.8
  Bottom Layer w30: C70.1 1943.06,3694.44 1943.06,3656.94 C68.1 2001,3600 2075,3526 2075,3425 2067.5,3417.5 R44.1@2050.15,3417.5 ; R44.1 2031.5,3417.5 2044.5,3417.5 R44.1@2050.15,3417.5 ; R43.2 2124.5,3391 2098,3417.5 R44.1@2050.15,3417.5
NetC68_2: C68.2 C70.2 R40.2 RP7.2 U9.7 | length 1100.7
  Bottom Layer w30: C68.2 2106.94,3606.94 2106.94,3661.58 2137.5,3692.14 C70.2 ; C68.2@2101.75,3601.75 2103.5,3600 2190.5,3600 2224.5,3566 R40.2@2246.5,3566 ; R40.2 R40.2@2246.5,3566 ; RP7.2 2271.83,3965.67 2271.83,3738.03 2385.37,3624.49 2435,3574.85 2435,3508.41 2414.09,3487.5 ; U9.7 2414.09,3487.5 ; R40.2@2246.5,3566 2325,3487.5 2414.09,3487.5
NetC71_1: C71.1 C74.1 C75.1 C76.1 R44.2 U9.5 | length 939.1
  Bottom Layer w30: C75.1 1830.56,3544.44 1830.56,3494.44 1925,3400 1925,3350 1986.5,3288.5 2022.5,3288.5 R44.2 ; C75.1@1825,3553.26 C74.1 ; R44.2@2040.5,3288.5 2042.5,3288.5 2090.5,3336.5 2180.5,3336.5 2188.44,3344.44 2244.44,3344.44 C71.1 ; C71.1@2247.81,3350 C76.1@2357.86,3350 ; C76.1 C76.1@2357.86,3350 ; U9.5 2435.91,3387.5 2432.72,3384.31 2392.17,3384.31 C76.1@2357.86,3350
NetC72_2: C72.2 C73.2 R42.2 U9.3 | length 627
  Top Layer w30: C73.2 C73.2@2418.06,2994.44 ; C72.2 C72.2@2500,3110.82
  Bottom Layer w30: R42.2 2230,2939.5 2233,2942.5 2280,2942.5 2331.94,2994.44 2406.94,2994.44 C73.2 ; C73.2@2412.5,3006.25 2498.6,3092.35 C72.2@2500,3092.35 ; U9.3 2532.43,3287.5 2550,3269.93 2550,3160.82 C72.2@2507.65,3118.48 ; C72.2 C72.2@2507.65,3107.65
NetC77_1: C77.1 C83.2 C91.2 R52.1 R72.1 R105.2 U10.8 | length 1590.8
  Bottom Layer w30: U10.8 4001.48,3545.47 4059,3603 4247,3603 R105.2@4287.5,3562.5 ; R52.1 4196.83,3446.83 4221.83,3446.83 4287,3512 4287,3533 R105.2 4287.5,3541.5 R105.2@4287.5,3562.5 ; C91.2 C91.2@4543.06,3793.06 ; C77.1 R72.1 4662.5,3837.5 ; C83.2 4662.5,3837.5 ; R105.2@4287.5,3562.5 4397.22,3672.22 4422.22,3672.22 C91.2@4543.06,3793.06 ; C91.2@4543.06,3793.06 4546.82,3793.06 4591.26,3837.5 4662.5,3837.5
NetC77_2: C77.2 R59.2 R64.2 R65.1 | length 372.6
  Bottom Layer w30: R64.2 4350.5,3779.77 R65.1 4351.25,3859.75 4426.25,3859.75 ; R59.2@4426.25,3945.75 4426.25,3859.75 ; C77.2 4532.87,3900 4491.87,3859 4427,3859 4426.25,3859.75
NetC78_1: C78.1 C80.1 C83.1 C84.2 C91.1 C92.2 R60.1 | length 1245.7
  Bottom Layer w30: R60.1@4464.66,3510 4464.66,3527.16 4519.44,3581.94 4531.94,3581.94 C91.1 4537.5,3687.5 4624.37,3774.37 4727.31,3774.37 4764.18,3737.5 C83.1 ; C78.1 4643.06,4181.94 4685.73,4181.94 4750,4117.68 4750,4000 4792.35,3957.65 4829.85,3957.65 C80.1 4837.5,3939.18 4869.44,3907.24 4869.44,3843.06 C92.2 C83.1 ; C84.2 4781.25,3643.75 4781.25,3731.25 C83.1
NetC79_1: C79.1 C81.1 R66.2 U10.3 | length 912.8
  Bottom Layer w30: R66.2 3164.5,2939.5 3255,3030 3256.68,3030 3276.68,3050 C81.1 3295.15,3057.65 3295.15,3092.51 3375,3172.35 3476.65,3274 3647.93,3274 3659.43,3262.5 U10.3 ; 3164.5,2928.68 3183.82,2928.68 C79.1
NetC79_2: C79.2 C81.2 C86.2 C87.2 R56.2 R62.2 | length 1138.2
  Bottom Layer w30: C86.2 3130.56,2831.94 3150.92,2831.94 3164.66,2818.2 3272.49,2818.2 3300,2845.71 3300,2962.5 C81.2 3388.5,3049 3458,3049 R56.2 3454.5,3043.5 3454.5,2943.82 3475,2923.32 C87.2@3475,2905.96 ; R62.2 3128.5,2677.75 3133,2682.25 3219.75,2682.25 C79.2 3308.21,2687.5 3400,2779.29 3475,2854.29 C87.2@3475,2905.96 ; C87.2 C87.2@3475,2905.96
NetC82_1: C82.1 R67.2 U10.5 | length 889.5
  Bottom Layer w30: R67.2@3666,3416 3670.5,3411.5 3684.61,3411.5 3698.61,3397.5 3699.77,3397.5 3734.77,3362.5 U10.5 ; R67.2 3666,3633.74 3679,3646.74 3679,3774.33 3650,3803.33 3650,3902.62 3747.38,4000 C82.1
NetC82_2: C82.2 C88.2 R58.2 R63.2 | length 1333.2
  Bottom Layer w30: C82.2 3840.95,4096.55 3941.48,4096.55 ; R63.2 3920.5,3079.5 3920.5,3090.5 3906.99,3104.01 3906.99,3476.01 3936.5,3505.52 3936.5,3597.5 R58.2 3941,3656.15 4035,3750.15 4035,4003.03 3941.48,4096.55 ; C88.2 3950,4105.07 3941.48,4096.55
NetC84_1: C84.1 C92.1 R68.2 R73.2 U10.12 | length 1777.7
  Bottom Layer w30: U10.12 4077.65,3262.5 4150.15,3190 4240,3190 4325,3105 4325,2981.45 4342.57,2963.88 4448.62,2963.88 4499.37,2913.13 4628.95,2913.13 4675,2959.17 4675,3074.31 4650,3099.31 R68.2@4650,3125.69 ; R68.2 4650,3118.2 4686.24,3154.44 4686.24,3211.24 R73.2 ; R73.2@4696.93,3208.74 4710.02,3221.83 4781.68,3221.83 4825,3265.15 4825,3489.18 4787.5,3526.68 C84.1 4857.5,3607.5 4857.5,3612.14 4875,3629.64 C92.1
NetC85_1: C85.1 C89.1 C90.1 R65.2 U10.10 | length 1605.7
  Top Layer w30: v1(4325,3687.5) 4330.41,3687.5 4340.41,3677.5 4346.59,3677.5 4400,3624.09 4400,3612.5 v1(4412.5,3600) ; v1@4402.5,3602.91 v1@4405.41,3600 ; v1@4412.5,3592.91 v1@4405.41,3600 ; v1@4405.41,3600 v1(4412.5,3600) ; v1@4405.41,3600 v1(4412.5,3600)
  Bottom Layer w30: C90.1 C90.1@4005.56,4306.94 ; U10.10 4250,3362.5 4362.5,3475 4362.5,3550 v1(4412.5,3600) ; C89.1 4011.12,4312.5 C90.1@4005.56,4306.94 ; v1(4325,3687.5) 4321.17,3691.33 4312.25,3691.33 4285.37,3718.2 4285.37,3835.59 4267.8,3853.16 4226,3853.16 4221.5,3857.66 R65.2 4217,3865 4217,3920.5 4131.94,4005.56 4103.18,4005.56 4016.25,4092.49 4016.25,4167.26 4020,4171.01 4020,4228.99 4005.56,4243.44 C90.1@4005.56,4306.94
NetC85_2: C85.2 R49.1 R50.1 R58.1 R64.1 U10.7 | length 1200.8
  Top Layer w30: v1(3972.29,3772.29) 3977.71,3772.29 3980.41,3775 3992.91,3762.5 4129.73,3762.5 4144.9,3777.66 v1(4147.87,3777.66)
  Bottom Layer w30: R50.1 3734.33,3871.83 3761.33,3871.83 3816.25,3926.75 ; U10.7 3812.25,3462.75 3812.25,3601.75 R58.1 3812,3613 3816.5,3617.5 3817.5,3617.5 3862.5,3662.5 ; R49.1@3837,3920.5 3837,3903.5 3822.5,3889 3822.5,3815.5 3797.5,3790.5 3797.5,3727.5 3862.5,3662.5 ; R49.1@3841.5,3930 3867.5,3930 C85.2 ; v1(3972.29,3772.29) 3975,3769.59 3928.75,3723.33 3928.75,3722.75 3906,3700 3900,3700 3862.5,3662.5 ; v1(4147.87,3777.66) 4147.87,3782.51 4151.7,3786.34 4217.87,3786.34 4222.37,3781.84 R64.1
NetC93_1: C93.1 C97.1 C100.2 C107.2 R81.1 R102.1 R103.1 R107.1 U11.8 | length 2171.3
  Top Layer w30: v1(6129.85,3700) v1@6134.28,3700 ; v1@6138.71,3700 v1@6134.28,3700 ; v1(6375,3662.5) 6171.78,3662.5 v1@6134.28,3700
  Bottom Layer w30: U11.8@5702.5,3365.69 5702.5,3490 5775,3562.5 5775,3612.5 5875,3712.5 C93.1 6099,3775 6107.5,3766.5 6118.5,3766.5 6126.68,3758.32 6126.68,3703.17 v1(6129.85,3700) ; R81.1 6162.5,2862.5 6250,2950 6250,3072.35 6327.5,3149.85 6365.15,3187.5 R102.1 ; v1(6375,3662.5) 6378.83,3658.67 6391.33,3658.67 6450,3600 C100.2 C107.2 R102.1 ; R103.1 R102.1
NetC93_2: C93.2 C97.2 R89.2 R94.2 R95.1 | length 448.4
  Bottom Layer w30: R94.2 5668,4100 5676.5,4108.5 R95.1@5689.25,4108.5 ; R95.1 R95.1@5689.25,4108.5 ; C93.2@5867.14,3975 C97.2 ; C93.2 5869.44,3980.56 5802.15,3980.56 5745.71,4037 5704.5,4037 R89.2 5698.25,4041.5 5693.75,4046 5693.75,4104 R95.1@5689.25,4108.5
NetC94_1: C94.1 C100.1 C101.2 C107.1 C108.2 R90.1 | length 484.2
  Bottom Layer w30: C108.2 5893.06,3494.44 5954.56,3494.44 5962,3487 R90.1 5977.5,3491.5 6033.64,3491.5 6042.14,3500 C101.2@6057.86,3500 ; C101.2 C101.2@6057.86,3500 ; C107.1 C100.1 6244.44,3493.06 6180.26,3493.06 6160.82,3512.5 C94.1 6143.06,3505.56 6063.42,3505.56 C101.2@6057.86,3500
NetC95_1: C95.1 C98.1 R96.2 U11.3 | length 619.1
  Bottom Layer w30: C95.1 5162.5,3551.68 5206.94,3507.24 5206.94,3455.56 C98.1 5214.5,3450 5362.5,3302 5362.5,3230.5 R96.2 ; R96.2@5361.5,3220.5 5377.5,3204.5 5377.5,3196.64 5412.19,3161.94 5529.96,3161.94 U11.3
NetC95_2: C95.2 C98.2 C103.2 C104.2 R84.2 R92.2 | length 954.4
  Bottom Layer w30: C98.2 5018.06,3455.56 5037.66,3455.56 5044.6,3462.5 5062.5,3462.5 ; C95.2 5062.5,3462.01 5080.07,3444.44 5081.56,3444.44 5136.5,3389.5 5136.5,3256.5 R92.2@5145.5,3247.5 ; C95.2@5068.75,3557.93 5068.75,3693.75 C104.2 5142.14,3700 5192.14,3650 C103.2 ; R92.2@5141,3241 R92.2 R92.2@5145.5,3247.5 ; R84.2 5154.5,3016 5150,3020.5 5150,3218.93 5145.5,3223.43 R92.2@5145.5,3247.5
NetC96_1: C96.1 C99.1 R97.2 U11.5 | length 1020.1
  Top Layer w30: v1@5425,3225 5425.56,3225.56 5549.44,3225.56 v1(5775,3000) ; C99.1 C99.1@5938.47,2963.47 ; C96.1@6036.53,2961.53 C96.1
  Bottom Layer w30: v1(5437.5,3225) 5437.5,3238.06 5450,3250.56 5460.94,3261.5 5475,3261.5 5476,3262.5 U11.5 ; v1(5775,3000) 5859.85,3000 5867.85,2992 5900.14,2992 C99.1@5929.64,2962.5 ; C99.1 C99.1@5929.64,2962.5 ; R97.2 6163.86,3034 6159.36,3029.5 6159.36,3003.86 6123.03,2967.53 6042.53,2967.53 C96.1 C99.1@5929.64,2962.5
NetC96_2: C96.2 C99.2 C109.2 C110.2 R86.2 R93.2 | length 3430.1
  Bottom Layer w30: R86.2 5629,3987.5 5629.5,3987 5725,3987 5812,3900 6012.5,3900 6050,3937.5 6050,3977.4 6085.1,4012.5 6165.5,4012.5 6228,3950 6298,3950 6330,3918 6330,3792.35 6514.53,3607.83 6514.53,3317.41 6662.5,3169.44 6662.5,2733.21 6591.79,2662.5 6399.12,2662.5 6324.12,2737.5 6069.6,2737.5 C96.2@6044.6,2762.5 ; R93.2 5750,2929 C109.2 C110.2 5869.44,2756.94 5931.94,2756.94 C99.2 C96.2@6044.6,2762.5 ; C96.2 C96.2@6044.6,2762.5
NetC101_1: C101.1 C108.1 R98.2 R102.2 R103.2 U11.12 | length 1399.2
  Top Layer w30: v1(6237.5,3300) 6383.67,3153.83 6383.67,3128.83 v1(6387.5,3125)
  Bottom Layer w30: U11.12 5844.85,3162.5 5888.65,3206.29 5888.65,3298.85 C108.1 C101.1@6057.86,3300 ; C101.1 C101.1@6057.86,3300 ; v1(6237.5,3300) 6232.09,3300 6195.22,3336.87 6094.73,3336.87 C101.1@6057.86,3300 ; R98.2 6329.66,3017.16 6329.66,3067.16 v1(6387.5,3125) ; R98.2@6325,3014.46 6325,2912.51 R102.2 ; R102.2@6462.5,2787.5 R103.2
NetC102_1: C102.1 C105.1 C106.1 R95.2 U11.10 | length 3718.4
  Top Layer w30: v1(5828.65,3231.15) 5835,3224.79 5835,2940 v1(5837.5,2937.5) ; v1(6602.5,3112.5) 6606.33,3116.33 6606.33,3138.65 6637.5,3169.82 6625,3182.32 v1(6625,3362.5)
  Bottom Layer w30: R95.2 5685.06,4237.5 5680.56,4242 5680.56,4319.44 C102.1 5681.25,4325 5781.25,4425 C105.1 5795.1,4417.4 5876.84,4417.4 5884.44,4425 C106.1 ; U11.10 5744.61,3262.5 5747.8,3259.31 5800.48,3259.31 v1(5828.65,3231.15) ; v1(5837.5,2937.5) 5837.43,2937.43 5837.43,2912.57 5889.53,2860.47 6030.78,2860.47 6103.13,2788.13 6344.2,2788.13 6419.2,2713.13 6568.31,2713.13 6612.5,2757.32 6612.5,2845.15 6602.5,2855.15 v1(6602.5,3112.5) ; C106.1@5899.74,4417.4 5914.53,4402.61 5914.53,4394.91 5959.44,4350 6032.21,4350 6057.21,4325 6064.42,4325 6430,3959.42 6430,3952.21 6625,3757.21 v1(6625,3362.5)
NetC102_2: C102.2 R78.1 R79.1 R87.1 R94.1 U11.7 | length 1259
  Top Layer w30: v1(5400,3900) 5400,3785.5 v1(5410.5,3775)
  Bottom Layer w30: R79.1 5383.5,3758.5 ; v1(5400,3900) 5400,4001.5 5487.5,4089 R94.1 5487.5,4242.68 5479.7,4250.47 5479.7,4320.3 C102.2 ; v1(5410.5,3775) 5405.09,3775 5395.09,3765 5390,3765 5383.5,3758.5 ; U11.7@5512.22,3365.69 5512.22,3525.28 5467.5,3570 5467.5,3581 R78.1 5467.5,3590 5467.5,3633 5489.5,3655 5489.5,3754 5487.5,3756 R87.1 5383.5,3758.5
NetD1_2: 
NetD1_4: 
NetD8_1: 
NetD8_2: 
NetD10_1: 
NetD10_2: 
NetD12_2: 
NetD13_2: 
NetD16_2: 
NetD18_2: 
NetD19_2: 
NetD22_2: 
NetF1_1: 
NetF1_2: 
NetJack2_1: Jack2.1 W3.1 W4.1 W5.1 W6.1 | length 1301.4
  Bottom Layer w30: Jack2.1@1662.5,3075 1662.5,2975 1668.82,2968.68 1668.82,2831.18 1937.5,2562.5 W3.1 W4.1 W5.1 W6.1
NetP7_1: 
NetP7_2: 
NetP7_3: 
NetP10_1: 
NetP12_1: 
NetP13_1: 
NetP14_2: 
NetP15_1: P15.1 RP7.3 | length 295.8
  Bottom Layer w30: RP7.3 2407.5,4075 2500,4167.5 P15.1
NetP15_2: P15.2 RP9.3 | length 2814.8
  Bottom Layer w30: P15.2 2700,4199.38 2721.76,4221.14 2732.43,4221.14 2750,4238.71 2750,4312.5 3025,4587.5 4115.89,4587.5 4290.89,4412.5 4745.71,4412.5 5011.38,4146.83 5103.17,4146.83 RP9.3
NetP15_3: P15.3 RP8.3 | length 1874.8
  Bottom Layer w30: P15.3 2893.24,4194.26 2893.24,4313.95 3066.79,4487.5 4074.47,4487.5 4214.53,4347.44 4214.53,4252.56 4213.13,4251.16 4213.13,4156.69 4282.32,4087.5 RP8.3
NetP15_4: P15.4 RP10.3 | length 406.1
  Bottom Layer w30: P15.4 3100.5,4187 3350,4187 3415.17,4121.83 3465.67,4121.83 RP10.3
NetQ1_1: 
NetQ1_2: 
NetR7_1: 
NetR9_2: 
NetR17_1: 
NetR21_1: 
NetR25_1: R25.1 R26.2 | length 74.8
  Bottom Layer w30: R26.2 2961.75,3770.25 2961.75,3703.25 R25.1
NetR27_2: R27.2 R28.2 | length 81.9
  Bottom Layer w30: R27.2 3171.83,3453.18 3212.32,3453.18 3220,3445.5 3231,3445.5 R28.2
NetR28_1: R28.1 R29.2 U9.13 | length 741
  Bottom Layer w30: U9.13 2683.21,3237.5 2686.4,3234.31 2700.89,3234.31 2748.58,3186.62 2748.58,3158 2753.08,3153.5 R29.2@2771.5,3153.5 ; R29.2 R29.2@2771.5,3153.5 ; R28.1 3224.5,3312 3220,3307.5 3220,3271.5 3182.5,3234 3102,3153.5 3099.21,3153.5 3091.71,3146 2798.43,3146 2795.44,3149 2776,3149 R29.2@2771.5,3153.5
NetR29_1: R29.1 R31.1 RP10.2 U9.14 | length 1850.1
  Bottom Layer w30: U9.14 2653.19,3184.31 2675,3184.31 2675,3099 2745,3029 2756,3029 R29.1 2765,3029 2801.5,3029 2834,3061.5 2845,3061.5 2849.5,3066 R31.1 2849.5,3025.75 2863.75,3011.5 3134.5,3011.5 3462.5,3339.5 3462.5,3597.75 3437.5,3622.75 3437.5,3961.81 3475,3999.31 RP10.2
NetR30_1: R30.1 R31.2 | length 463.8
  Bottom Layer w30: R31.2 3107.29,3077 3224.84,3194.54 3232.04,3194.54 3307.5,3270 3307.5,3307.5 3312,3312 R30.1
NetR32_2: R32.2 R36.1 | length 105.7
  Bottom Layer w30: R32.2 3227.5,4108 3320.5,4108 R36.1
NetR33_2: R33.2 R34.2 | length 85.9
  Bottom Layer w30: R33.2 3250.69,3875 3267.69,3892 3310,3892 R34.2
NetR36_2: R36.2 R37.1 | length 94.8
  Bottom Layer w30: R36.2 3336,4241.5 3340.5,4246 3340.5,4246.57 3357.5,4263.57 3357.5,4310 R37.1
NetR38_2: R38.2 R39.1 | length 118.8
  Bottom Layer w30: R38.2 1932.14,3530.36 1932.14,3509.94 1952.59,3489.5 R39.1
NetR39_2: R39.2 R40.1 U9.6 | length 353.3
  Bottom Layer w30: R39.2 2141,3478.5 2145.5,3474 2187.5,3474 2220,3441.5 2231,3441.5 R40.1 ; R40.1@2230.38,3437.5 U9.6
NetR41_1: R41.1 W3.2 | length 122.5
  Bottom Layer w30: R41.1 2027.5,2807.5 2038.5,2807.5 2080.2,2765.8 2121.7,2765.8 W3.2
NetR45_1: R45.1 R46.2 U10.2 | length 624.5
  Bottom Layer w30: R46.2 3659,3093 3658.5,3093.5 3658.5,3180.5 3690.5,3212.5 U10.2 ; R46.2@3663.5,3002.5 3663.5,2982.5 3713.5,2932.5 3824.93,2932.5 3842.5,2950.07 3842.5,2959 3857.5,2974 3857.5,2985 R45.1
NetR46_1: R46.1 R57.1 R63.1 U10.1 | length 274.1
  Bottom Layer w30: R57.1 3721.5,3144.5 3726,3149 3756.36,3149 3757.36,3150 3800,3150 U10.1 ; R46.1 3792,3002 3792,3071 R63.1 U10.1@3796,3159.31
NetR47_1: R47.1 R48.2 U10.6 | length 421.8
  Bottom Layer w30: R47.1 3734.19,3584.19 3734.19,3433.79 3752.3,3415.69 3784.19,3415.69 3787.38,3412.5 U10.6 ; R47.1@3738,3588 3738,3666.96 3743,3671.96 R48.2
NetR48_1: R48.1 R49.2 | length 194.4
  Bottom Layer w30: R48.1 3872,3776.5 3876.5,3781 3887.5,3781 3966,3859.5 R49.2
NetR50_2: R50.2 R51.1 | length 215.6
  Bottom Layer w30: R51.1 4089.5,3739.03 4087.87,3740.66 4087.87,3812.19 4125,3849.31 R50.2
NetR51_2: R51.2 R105.1 U10.9 | length 273.7
  Bottom Layer w30: U10.9 4071.93,3412.5 4089.5,3430.07 R51.2 4091.25,3535.75 4160.75,3535.75 R105.1
NetR52_2: R52.2 R53.1 | length 465.5
  Bottom Layer w30: R53.1 4550,3370.56 4578.17,3398.73 4578.17,3428.18 R52.2
NetR53_2: R53.2 R54.1 U10.13 | length 319
  Bottom Layer w30: U10.13 4056.94,3212.5 4112,3157.44 4112,3074.5 4112.5,3074 4112.5,3027.59 4150,2990.09 R53.2
NetR54_2: R54.2 R55.1 | length 82.2
  Bottom Layer w30: R54.2 4245.5,3085 4245.5,3017.5 4250,3013 R55.1
NetR55_2: R55.2 R61.2 RP8.2 U10.14 | length 3040.4
  Bottom Layer w30: U10.14 4026.59,3162.5 4057.5,3131.59 4057.5,2955 4128.5,2884 R55.2 4263,2884 4389.74,2884 4389.74,2893.38 4394.24,2897.88 R61.2 4408.12,2893.38 4419.12,2893.38 4449.38,2863.13 4649.66,2863.13 4737.5,2950.96 4737.5,3106.94 4887.5,3256.94 4887.5,3525 4942.5,3580 4942.5,3775.71 4950,3783.21 4950,4062.5 4879.85,4132.65 4879.85,4135.02 4702.37,4312.5 4404.29,4312.5 4287.5,4195.71 RP8.2
NetR56_1: R56.1 R57.2 | length 87.4
  Bottom Layer w30: R56.1 3590.25,3050.25 3590.25,3131.25 R57.2
NetR60_2: R60.2 R61.1 | length 369.2
  Bottom Layer w30: R61.1 4403.62,3116.12 4450,3162.5 4450,3375.66 R60.2
NetR62_1: R62.1 W4.2 | length 888.5
  Bottom Layer w30: W4.2 2401.03,2876.03 2492.82,2876.03 2541.79,2925 2687.5,2925 2738.5,2874 2794.06,2874 2975.56,2692.5 2995,2692.5 2999.5,2688 R62.1
NetR66_1: R66.1 R69.2 | length 58.5
  Bottom Layer w30: R69.2 R66.1
NetR67_1: R67.1 R70.2 | length 86.6
  Bottom Layer w30: R70.2 3536.25,3341.75 3536.25,3426.25 R67.1
NetR68_1: R68.1 R71.2 | length 744.5
  Bottom Layer w30: R71.2 3966.94,2850 4054.44,2762.5 4600,2762.5 R68.1
NetR72_2: R72.2 R73.1 | length 85.4
  Bottom Layer w30: R72.2@4662.5,3687.5 4662.5,3686.81 4687.5,3661.81 R73.1
NetR74_1: R74.1 R75.2 U11.2 | length 290.2
  Bottom Layer w30: R74.1 5215.75,3138.25 5295.25,3138.25 R75.2 5302.5,3136.5 5313.5,3136.5 5320.48,3129.52 5326,3129.52 5343.57,3111.94 U11.2@5488.88,3111.94
NetR75_1: R75.1 R85.1 R93.1 U11.1 | length 379.6
  Bottom Layer w30: R75.1 5302.5,3016.5 5313.5,3016.5 5335,3038 R85.1 ; R85.1@5419,3033.5 5445.84,3033.5 5464.67,3014.67 ; U11.1 5505.39,3062.5 5490,3047.11 5490,3040 5464.67,3014.67 ; R93.1 5491.84,2987.5 5464.67,3014.67
NetR76_1: R76.1 R77.2 U11.6 | length 462.1
  Bottom Layer w30: R76.1 5420,3685 5420,3674 5408.5,3662.5 5408.5,3508 5441,3475.5 5441,3354.32 5482.81,3312.5 U11.6
NetR77_1: R77.1 R78.2 | length 130.1
  Bottom Layer w30: R77.1 5312,3552.5 5334,3574.5 R78.2
NetR79_2: R79.2 R80.1 | length 161.2
  Bottom Layer w30: R79.2 5321.82,4096.83 5321.82,4134.32 R80.1
NetR80_2: R80.2 R106.2 U11.9 | length 1374.6
  Top Layer w30: v1(6029.25,4041.5) 6029.25,4040.47 6039.53,4030.19 6039.53,3727.03 6037.5,3725 v1(6037.5,3712.5)
  Bottom Layer w30: U11.9 5780.22,3312.5 5797.8,3330.07 5797.8,3392.35 5752.5,3437.65 5752.5,3469.29 5825,3541.79 5825,3575 5960.47,3710.47 6035.47,3710.47 v1(6037.5,3712.5) ; R80.2 5809.33,4203.17 5838.77,4203.17 5979.44,4062.5 6002.84,4062.5 6023.84,4041.5 v1(6029.25,4041.5) ; v1@6045.71,4052.13 6068.57,4075 6122.25,4075 R106.2
NetR81_2: R81.2 R82.1 U11.13 | length 506
  Bottom Layer w30: U11.13 5747.24,3112.5 5747.8,3111.94 5874.44,3111.94 5961.5,3199 5961.5,3221 5966,3225.5 6099.81,3225.5 6136.81,3262.5 R81.2
NetR82_2: R82.2 R83.1 | length 134
  Bottom Layer w30: R82.2 5988,3096.5 5992.5,3101 5992.5,3112 6039,3158.5 6072.5,3158.5 R83.1
NetR83_2: R83.2 R91.2 RP9.2 U11.14 | length 3226.1
  Bottom Layer w30: RP9.2 5112.5,4337.5 5175,4400 5487.5,4400 5497.97,4389.53 5501.73,4389.53 5550,4341.26 5550,4067 5562.5,4054.5 5562.5,3867.44 5630.94,3799 5743,3799 5783.52,3839.53 6014.23,3839.53 6017.26,3836.5 6088.5,3836.5 6090,3835 6149.5,3835 6200,3784.5 6200,3660.07 6195.5,3655.57 6195.5,3642.5 6191,3638 6191,3617 6195,3613 6332.5,3613 6378.29,3567.21 6378.29,3282.58 6277.5,3181.79 6277.5,3176.5 6209.5,3108.5 6208.5,3108.5 6188.5,3088.5 6119.5,3088.5 6092.5,3061.5 6092.5,3038.5 6088,3034 5988.9,3034 5980.9,3042 5895.5,3042 5875.56,3061.94 5720.04,3061.94 U11.14
NetR84_1: R84.1 R85.2 | length 271
  Bottom Layer w30: R84.1 5303.15,2887 5312.65,2877.5 5372,2877.5 5399,2904.5 5410,2904.5 R85.2
NetR86_1: R86.1 R87.2 | length 103.5
  Bottom Layer w30: R87.2 5487.5,3968 5496,3976.5 R86.1
NetR88_2: R88.2 R89.1 | length 59.8
  Bottom Layer w30: R88.2 5699,3854.5 5699,3911.5 R89.1
NetR90_2: R90.2 R91.1 | length 97.4
  Bottom Layer w30: R90.2 6057.5,3616 6062,3620.5 R91.1
NetR92_1: R92.1 W5.2 | length 3262.8
  Bottom Layer w30: W5.2 2510,2822.5 2774.85,2822.5 2904.81,2692.54 2904.81,2670.05 3012.36,2562.5 3072.79,2562.5 3073.79,2561.5 3361.5,2561.5 3562.5,2762.5 3983.73,2762.5 4033.73,2712.5 4544.82,2712.5 4619.19,2638.13 4680.8,2638.13 4724.37,2681.69 4724.37,2796.41 4853.94,2925.98 4853.94,3076.29 4987.5,3209.85 4987.5,3216.5 5012,3241 R92.1
NetR96_1: R96.1 R99.2 | length 138.9
  Bottom Layer w30: R99.2 5208,3347.5 5208,3336.5 5234.39,3310.11 5234.39,3303.11 5237,3300.5 R96.1
NetR97_1: R97.1 R100.2 | length 498.6
  Bottom Layer w30: R97.1 6169,3167.5 6180,3167.5 6203.46,3190.96 6217.46,3190.96 6227.5,3201 6227.5,3202.5 6325,3300 6325,3525 6303,3547 6303,3554 6298.5,3558.5 R100.2
NetR98_1: R98.1 R101.2 | length 1347.8
  Top Layer w30: R101.2 R101.2@5067.16,2632.84
  Bottom Layer w30: R101.2 5075.69,2637.5 5098.98,2614.21 5115.11,2614.21 5149.32,2580 5891.49,2580 5973.99,2662.5 6275,2662.5 R98.1
NetR100_1: R100.1 R104.2 | length 212.5
  Bottom Layer w30: R104.2 6264.5,3710.5 6272,3703 6272,3692 6276.5,3687.5 R100.1
NetR106_1: R106.1 R107.2 | length 60.3
  Bottom Layer w30: R107.2 6124.62,3892.62 6124.62,3948.38 R106.1
NetRP1_3: 
NetRP2_3: 
NetRP3_1: 
pads on no net: Jack2.2

## Other copper
Bottom Layer:
  text "FILTROS 3.0" at 6639.16,3839.16 h200 r315

## Silkscreen, mask and mechanical layers (free items; w line width, h text height)
Top Overlay:
  lines w10: 1350,2437.5 1350,4687.5 6750,4687.5 6750,2437.5 1350,2437.5
  text "12V" at 2125,4412.5 h150 r90
  text "PB" at 2537.5,4387.5 h150 r90
  text "PBS" at 2735.74,4387.5 h150 r90
  text "PBI" at 2950,4387.5 h150 r90
  text "PA" at 3150,4387.5 h150 r90
  text "-12V" at 1712.5,4362.5 h150 r90
  text "GND" at 1923.24,4362.5 h150 r90
  text "PA" at 3525,4362.5 h150 r90
  text "PBS" at 5148.24,4350 h150 r90
  text "PBI" at 4337.5,4312.5 h150 r90
  text "PB" at 2325,4262.5 h150 r90
  text "PB" at 2627.5,4152.5 h60 r180
  text "PBI" at 2137.5,2850 h150
  text "PBS" at 2386.04,2848.77 h150
  text "PB" at 1862.5,2612.5 h150
  text "PA" at 2700,2600 h150

## Dimensions
6750,2437.5 to 6837.5,4687.5 on Top Overlay
1350,4600 to 6762.5,4612.5 on Top Overlay

## Text inside footprints (layer, text, board x,y; h text height)
C111: Top Overlay "+" at 2545,3652.5 h60 r180
C112: Top Overlay "+" at 5707.5,3565 h60 r180
C113: Top Overlay "+" at 3492.5,3722.5 h60
C114: Top Overlay "+" at 3020,3227.5 h60 r180
C115: Top Overlay "+" at 5590,2792.5 h60 r90
C116: Top Overlay "+" at 4315,3205 h60 r90